# Altium PCB Dev_Board_Rev4.PcbDoc
Units mm, origin at the board's own origin, x right, y up, seen from the top; angles counter-clockwise.
Board outline 70 x 60 mm, 2 copper layers (Top Layer, Bottom Layer); 62 components, 49 nets, 269 pads, 20 vias.
Unrouted connection lines stored in the file: 1.
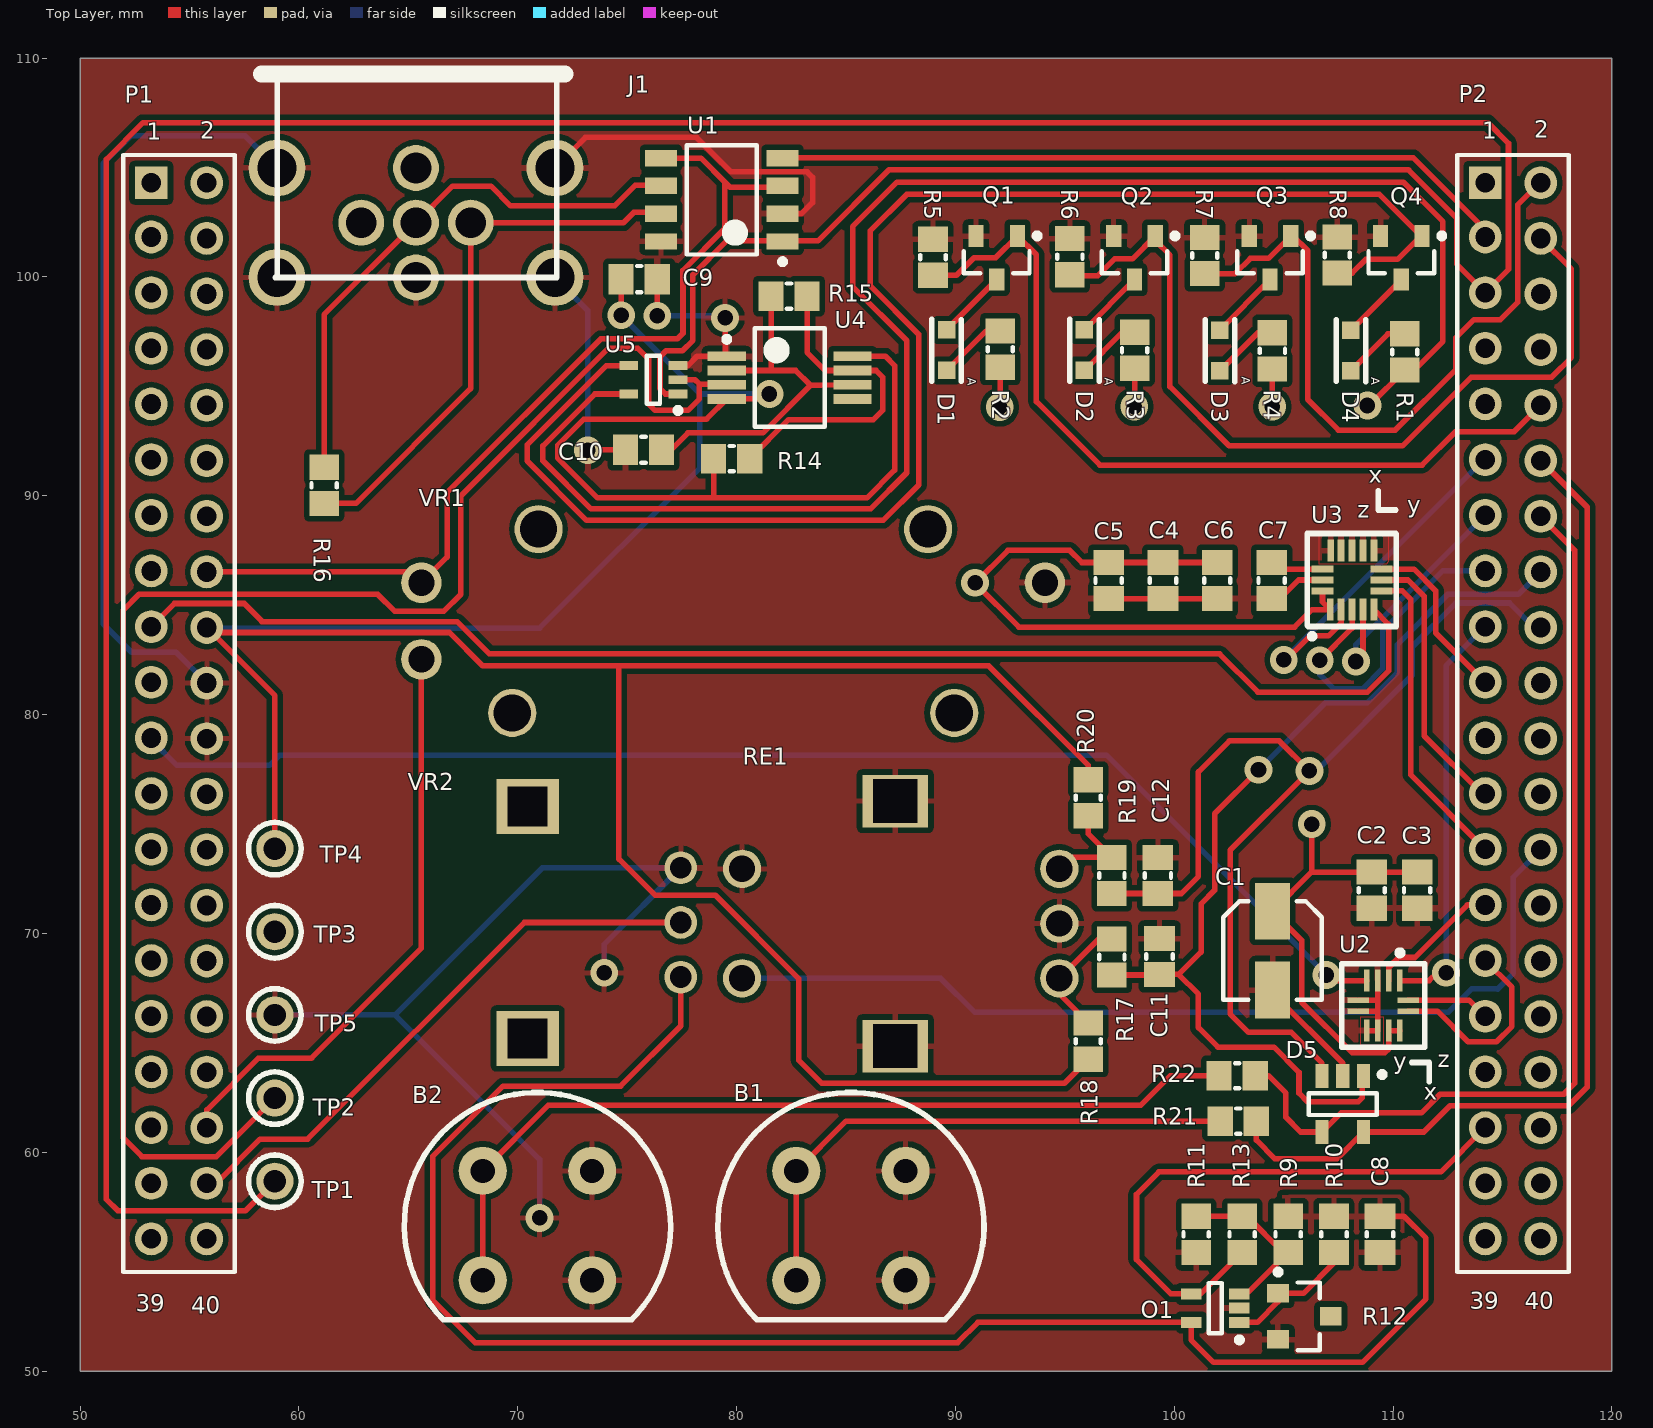
[diagram p0: Top Layer view]
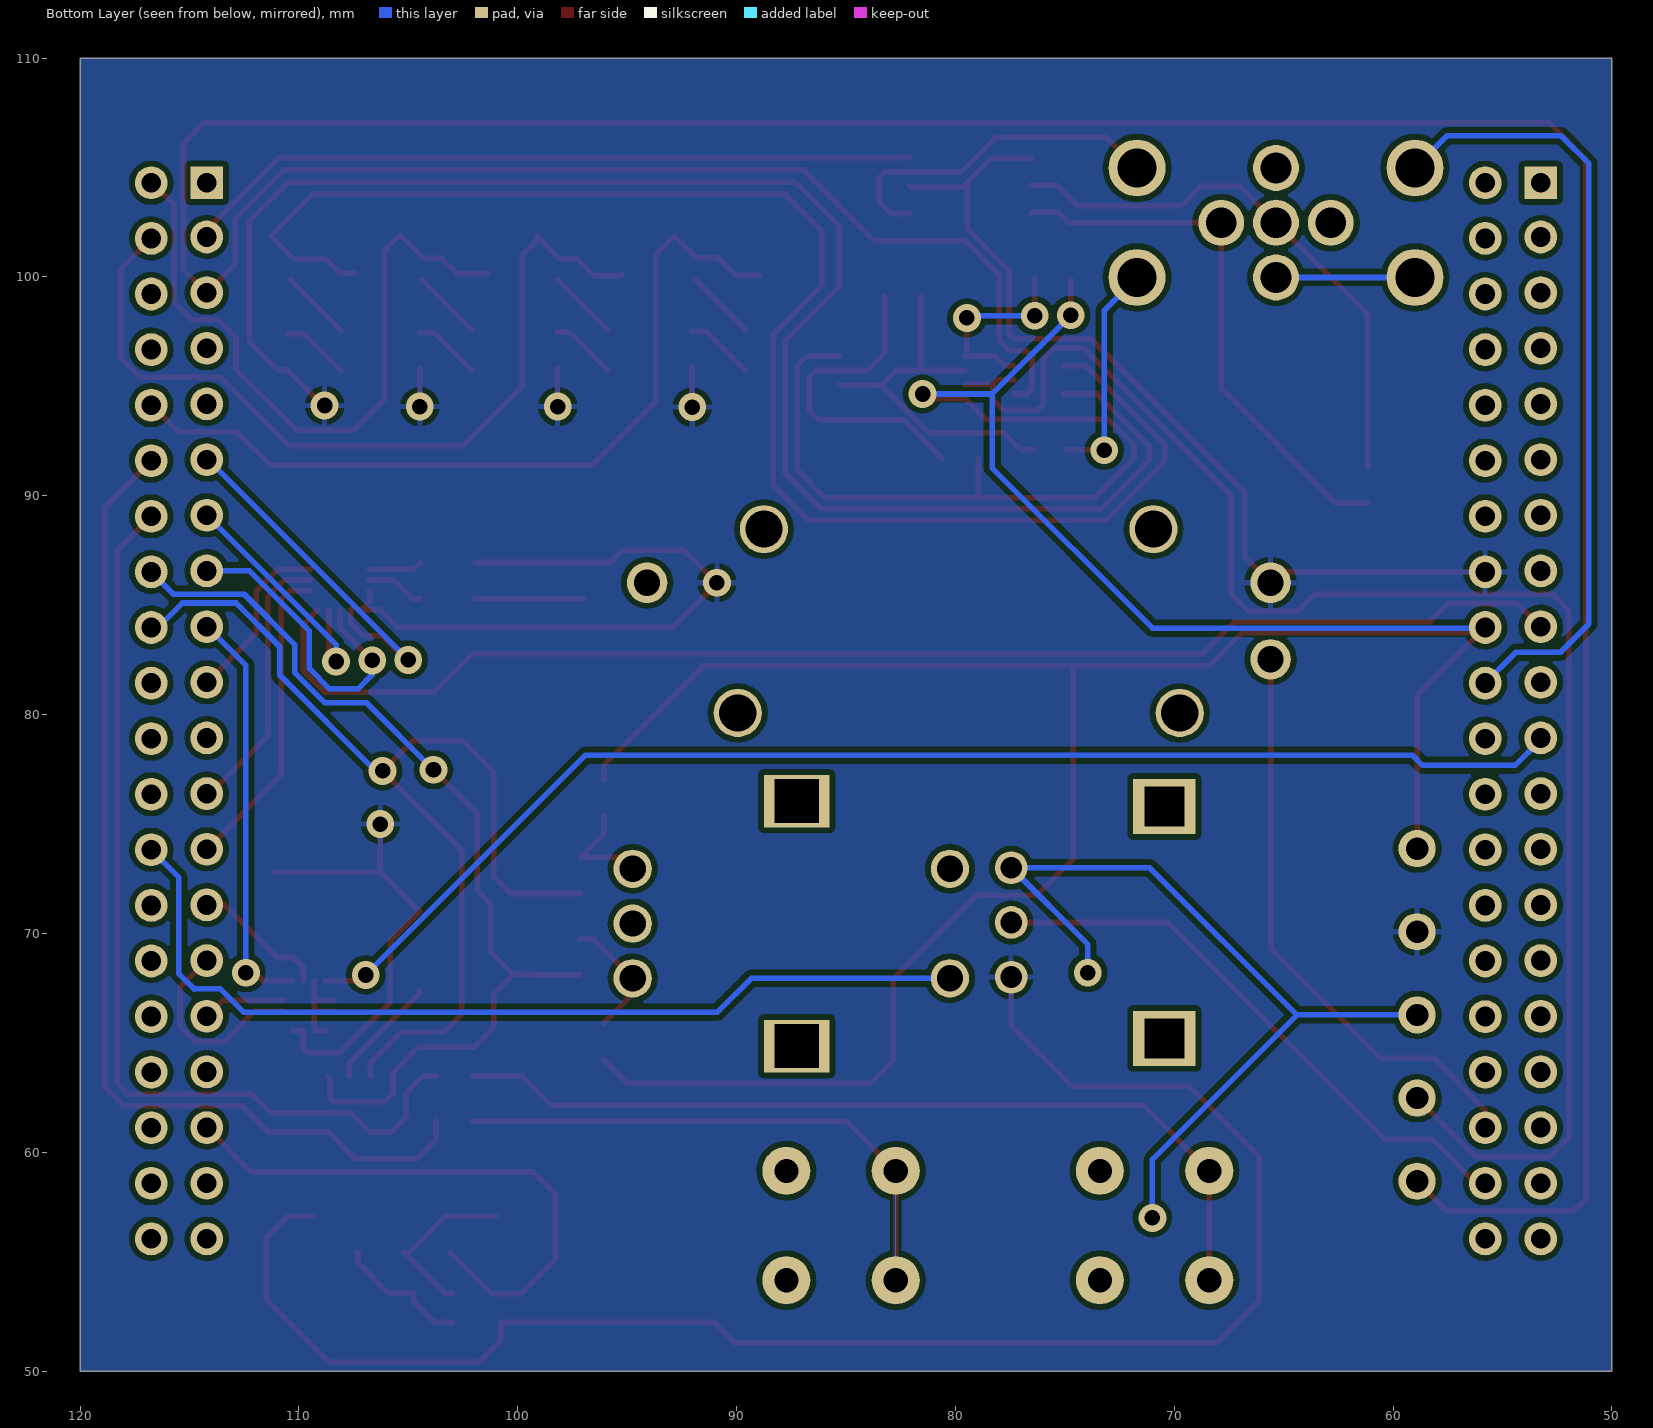
[diagram p1: Bottom Layer view, seen from below]
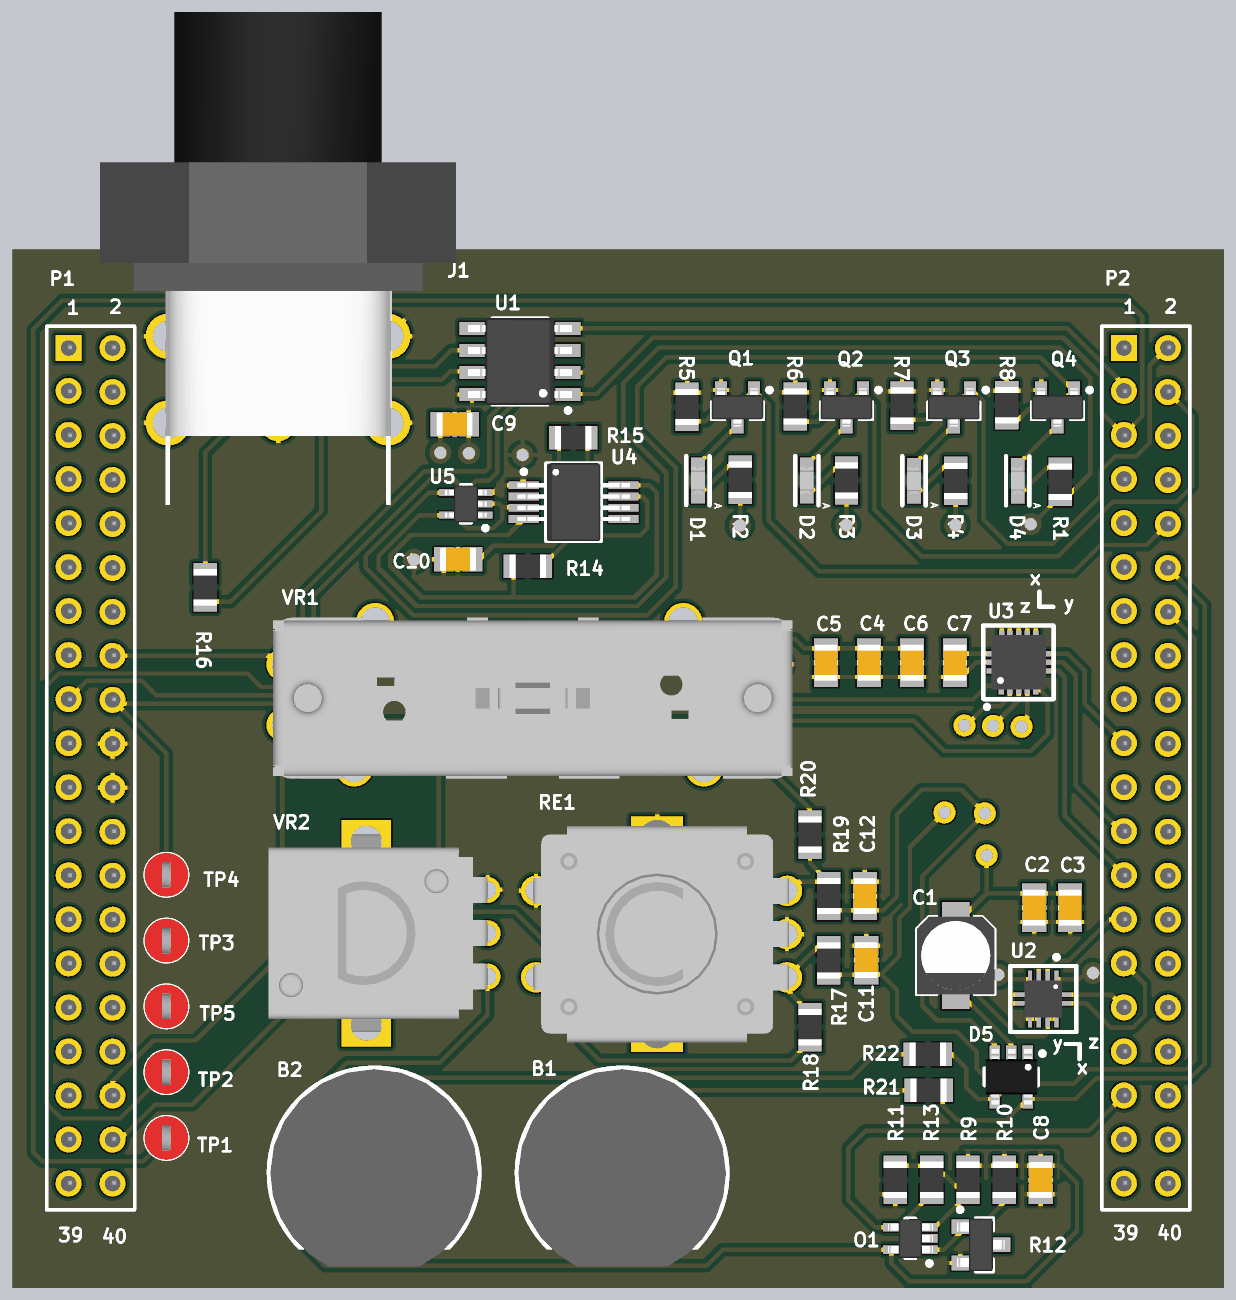
[diagram p2: 3D render of the assembled board from above, using the file's embedded part models]

## Layer stack, top to bottom
Top Solder: solder mask 0.0102, Solder Resist, Dk 3.5
Top Layer: signal copper 0.0356
Dielectric 1: dielectric 0.32, FR-4, Dk 4.8
Bottom Layer: signal copper 0.0356
Bottom Solder: solder mask 0.0102, Solder Resist, Dk 3.5

## Board outline
50,50 50,110 120,110 120,50

## Design rules (kind name [scope] priority, off if disabled: settings)
Clearance [All] p1: gap=0.254 ignorepadtopadclearanceinfootprint=TRUE except(0: Arc-Arc Arc-Track Arc-SMDPad Arc-THPad Arc-Via Arc-Text Arc-Hole Track-Track Track-SMDPad Track-THPad Track-Via Track-Text Track-Hole SMDPad-Hole THPad-Hole Via-Hole Fill-Hole Poly-Hole Region-Hole Text-Hole)
PolygonConnect [All] p1: connectstyle=Relief reliefconductorwidth=0.254 reliefentries=4 polygonreliefangle="90 Angle" airgapwidth=0.254
RoomDefinition U_ACCELEROMETER [InComponentClass('U_ACCELEROMETER')] p1: confinementstyle=ConfineIn formatcopy=TRUE lockcomponents=FALSE outline 100.964,64.983 100.964,73.441 108.022,73.441 108.022,73.9 112.264,73.9 112.264,64.576 107.057,64.576 107.057,64.983
RoomDefinition U_LEDS [InComponentClass('U_LEDS')] p2: confinementstyle=ConfineIn formatcopy=TRUE lockcomponents=FALSE outline 87.75,94.225 112.8,94.225 112.8,103.225 87.75,103.225
RoomDefinition U_GYRO [InComponentClass('U_GYRO')] p3: confinementstyle=ConfineIn formatcopy=TRUE lockcomponents=FALSE outline 95.8,88.675 110.325,88.675 110.325,83.325 95.8,83.325
RoomDefinition U_TEMP_SENSE [InComponentClass('U_TEMP_SENSE')] p4: confinementstyle=ConfineIn formatcopy=TRUE lockcomponents=FALSE outline 99.771,54.321 99.771,58.179 108.171,58.179 108.171,58.229 110.629,58.229 110.629,54.271 108.154,54.271 108.154,50.421 103.746,50.421 103.746,50.921 99.796,50.921 99.796,54.321
RoomDefinition U_INPUTS [InComponentClass('U_INPUTS')] p5: confinementstyle=ConfineIn formatcopy=TRUE lockcomponents=FALSE outline 64.319,78.619 64.319,89.931 95.371,89.931 95.371,78.129 97.304,78.129 97.304,74.629 100.479,74.629 100.479,70.929 100.554,70.929 100.554,64.729 104.804,64.729 104.804,64.554 110.004,64.554 110.004,59.846 91.689,59.846 91.689,50.996 64.436,50.996 64.436,78.619
RoomDefinition U_Connector [InComponentClass('U_Connector')] p6: confinementstyle=ConfineIn formatcopy=TRUE lockcomponents=FALSE outline 54.813,94.973 54.813,123.977 75.888,123.977 75.888,94.973 62.379,94.973 62.379,88.546 59.921,88.546 59.921,94.973
RoutingVias [All] p1: holewidth=0.711 width=1.27 viastyle="Through Hole" minholewidth=0.711 minwidth=1.27 maxholewidth=0.711 maxwidth=1.27
SolderMaskExpansion [All] p1: expansion=0.102
UnpouredPolygon [All] p1 off:
Width [All] p1: maxlimit=0.254 minlimit=0.254 preferedwidth=0.254
29 further rules are at their usual default settings.

## Classes and differential pairs
component class Main: P1 P2 TP1 TP2 TP3 TP4 TP5
component class U_555_OSC: C9 C10 R14 R15 U4
component class U_ACCELEROMETER: C1 C2 C3 U2
component class U_Connector: J1 R16
component class U_D-FLIP-FLOP: U5
component class U_INPUTS: B1 B2 C11 C12 D5 R17 R18 R19 R20 R21 R22 RE1 VR1 VR2
component class U_LEDS: D1 D2 D3 D4 Q1 Q2 Q3 Q4 R1 R2 R3 R4 R5 R6 R7 R8
component class U_TEMP_SENSE: C8 O1 R9 R10 R11 R12 R13
component class U_Transeiver: U1
component class U_GYRO: C4 C5 C6 C7 U3

## Components (designator, comment, footprint, x,y, rotation, side; value= is the part's Value field where it differs from the comment)
B1 "D6R90 F1 LFS" MomentaryButton 85.225,56.65 r0 top
B2 "D6R90 F1 LFS" MomentaryButton 70.9,56.65 r0 top
C1 "875105240001" "Aluminum Cap 875105240001" 104.493,69.212 r270 top
C2 "C0805C104K5RACTU" CAP0805 109.025,71.975 r90 top
C3 "C0805C104K5RACTU" CAP0805 111.1,71.975 r90 top
C4 "C0805C104K5RACTU" CAP0805 99.483,86.125 r90 top
C5 "C0805C104K5RACTU" CAP0805 97,86.125 r90 top
C6 "C2012JB1V106K125AC" CAP0805 101.967,86.125 r90 top
C7 "CGA4C2C0G1H103J060AA" CAP0805 104.45,86.125 r90 top
C8 "C0805C104K5RACTU" CAP0805 109.4,56.25 r90 top
C9 "CGA4C2C0G1H103J060AA" CAP0805 75.55,99.9 r180 top
C10 "C2012JB1V106K125AC" CAP0805 75.75,92.1 r0 top
C11 "CGA4C2C0G1H103J060AA" CAP0805 99.325,68.95 r90 top
C12 "CGA4C2C0G1H103J060AA" CAP0805 99.25,72.65 r270 top
D1 "SMLE12BC7TT86" SMLE12BC7TT86 89.6,97.575 r270 top
D2 "SML-D12U8WT86" SML-D12U8WT86 95.892,97.575 r270 top
D3 "SML-D12M8WT86" SML-D12M8WT86 102.083,97.561 r270 top
D4 "SML-511WWT86" SML-511WWT86 108.075,97.562 r270 top
D5 "RCLAMP3354S.TCT" SOT95P280X145-5N 107.7,62.2 r270 top
J1 "MOLEX 84864-9003" "MOLEX 84864-9003" 65.35,102.477 r0 top locked
O1 "MCP6241U" MCP6241U 101.875,52.875 r180 top
P1 "Female Header 20x2_BOTTOM" "FEMALE HDR2X20_BOTTOM" 53.25,104.3 r270 top locked
P2 "Female Header 20x2_BOTTOM" "FEMALE HDR2X20_BOTTOM" 114.21,104.3 r270 top locked
Q1 "2N7002P,215" 2N7002P,215 91.888,100.875 r270 top
Q2 "2N7002P,215" 2N7002P,215 98.183,100.875 r270 top
Q3 "2N7002P,215" 2N7002P,215 104.379,100.875 r270 top
Q4 "2N7002P,215" 2N7002P,215 110.375,100.875 r270 top
R1 "ERJ-6ENF64R9V" RES0805 110.538,96.575 r270 top
R2 "CRCW080588R7FKEA" RES0805 92.05,96.7 r270 top
R3 "RMCF0805JT56R0" RES0805 98.188,96.65 r270 top
R4 "RMCF0805JT56R0" RES0805 104.488,96.625 r270 top
R5 "RC0805FR-0710KL" RES0805 88.975,100.9 r270 top
R6 "RMCF0805FT10K0" RES0805 95.233,100.925 r270 top
R7 "RMCF0805FT10K0" RES0805 101.392,100.975 r270 top
R8 "RMCF0805FT10K0" RES0805 107.45,101 r270 top
R9 "RC0805FR-0756KL" RES0805 105.2,56.25 r90 top
R10 "RC0805FR-0756KL" RES0805 107.3,56.25 r90 top
R11 "ERJ-6ENF1131V" RES0805 101,56.25 r90 top
R12 "G-NICO-001" G-NICO-001 105.95,52.5 r0 top
R13 "RC0805FR-0739KL" RES0805 103.1,56.25 r270 top
R14 "ERJ-6ENF8871V" RES0805 79.775,91.7 r180 top
R15 "RC0805FR-0710KL" RES0805 82.4,99.125 r0 top
R16 "DNP" RES0805 61.15,90.475 r270 top
R17 "RC0805FR-0710KL" RES0805 97.15,68.925 r270 top
R18 "RC0805FR-0710KL" RES0805 96.075,65.075 r90 top
R19 "RC0805FR-0710KL" RES0805 97.15,72.65 r270 top
R20 "RC0805FR-0710KL" RES0805 96.075,76.2 r90 top
R21 "RC0805FR-07100RL" RES0805 102.925,61.425 r0 top
R22 "RC0805FR-07100RL" RES0805 102.875,63.5 r0 top
RE1 "PEC12R-4217F-S0024" "Bourns Inc. PEC12R-4217F-S0024" 94.75,67.95 r90 top
TP1 "Keystone Electronics 5000" "TEST POINT 5000K" 58.9,58.675 r270 top
TP2 "Keystone Electronics 5000" "TEST POINT 5000K" 58.9,62.475 r270 top
TP3 "Keystone Electronics 5000" "TEST POINT 5000K" 58.9,70.075 r270 top
TP4 "Keystone Electronics 5000" "TEST POINT 5000K" 58.9,73.875 r270 top
TP5 "Keystone Electronics 5000" "TEST POINT 5000K" 58.9,66.275 r270 top
U1 "SN65HVD234" SN65HVD234DR 79.325,103.525 r180 top
U2 "LIS2HH12TR" LIS2HH12TR 109.55,66.7 r270 top
U3 "L3GD20HTR" L3GD20HTR 108.125,86.15 r90 top
U4 "NE555PWR" TSOP65P650X120-8N 82.425,95.4 r0 top
U5 "SN74AUP1G79DCKR" SOT65P210X110-5N 76.2,95.3 r180 top
VR1 "PTA1543-2010CIB103" PTA1543-2010CIB103 79.85,84.275 r0 top
VR2 "PTV09A-4015F-B103" PTV09A-4015F-B103 77.45,70.5 r90 top

## Footprints (in the part's own frame and the unit in brackets; to place one, negate y for a bottom-side part, rotate by r counter-clockwise, add the part's x,y. Pads: shape width x height; smd on the part's side, far side on the other; paste and mask are expansions set on the pad)
2N7002P,215 [mm] "MOSFET N-CH 60V 0.36A SOT-23"
  rect 1x0.7 smd: D(1,0) G(-1,0.95) S(-1,-0.95)
  silkscreen extent -1.12,-1.5 0.7,1.98, body extent -1.1,-1.5 1.1,1.5, height 1.1
"Aluminum Cap 875105240001" [mm] "Aluminum Polymer Capacitor Radial, Can - SMD 45 mOhm 2000 Hrs @ 105°C"
  rect 2.6x1.6 smd: 1(-1.8,0) 2(1.8,0)
  silkscreen extent -2.25,-2.25 2.25,2.25, body extent -2.25,-2.25 2.25,2.25, height 6.3
"Bourns Inc. PEC12R-4217F-S0024" [mm] "ENCODER ROTARY"
  round 1.75 hole 1.2: 1(0,0) 2(2.5,0) 3(5,0) 4(0,14.5) 5(5,14.5)
  rect 2.4x3 hole 2 square unplated: 2(-3.1,7.5) 2(8.1,7.5)
  body extent -4.5,-0.1 9.5,14.65, height 17.5
CAP0805 [mm] "Capacitor with Footprint 0805"
  rect 1.15x1.4 smd: 1(-0.825,0) 2(0.825,0)
  silkscreen extent -0.1,-0.6 0.1,0.6, body extent -1.05,-0.67 1.05,0.68, height 1.55
"FEMALE HDR2X20_BOTTOM" [mm] "Connector; Header; 20x2 Position"
  rect 1.5x1.5 hole 0.9: 1(0,0)
  round 1.5 hole 0.9: 2(0,2.54) 3(2.475,0) 4(2.54,2.54) 5(5.019,0) 6(5.08,2.54) 7(7.562,0) 8(7.62,2.54) 9(10.106,0) 10(10.16,2.54) 11(12.649,0) 12(12.7,2.54) 13(15.193,0) 14(15.24,2.54) 15(17.737,0) 16(17.78,2.54) 17(20.28,0) 18(20.32,2.54) 19(22.824,0) 20(22.86,2.54) 21(25.367,0) 22(25.4,2.54) 23(27.911,0) 24(27.94,2.54) 25(30.455,0) 26(30.48,2.54) 27(32.998,0) 28(33.02,2.54) 29(35.542,0) 30(35.56,2.54) 31(38.086,0) 32(38.1,2.54) 33(40.629,0) 34(40.64,2.54) 35(43.173,0) 36(43.18,2.54) 37(45.716,0) 38(45.72,2.54) 39(48.26,0) 40(48.26,2.54)
  silkscreen extent -1.27,-1.27 49.78,3.81, body extent -1.31,-1.18 49.49,3.9, height 2.7
G-NICO-001 [mm] "RTD -55°C ~ 150°C TO-236-3, SC-59, SOT-23-3"
  rect 1x0.85 smd: 1(-1.2,1.05) 2(-1.2,-1.05) 3(1.2,0)
  silkscreen extent -1.32,-1.55 0.7,2.15, body extent -1.37,-1.53 1.37,1.53, height 1.12
L3GD20HTR [mm] "IC MEMS MOTION SENSOR 16LLGA"
  rect 1x0.31 smd: 1(-1.35,1) 2(-1.35,0.5) 3(-1.35,0) 4(-1.35,-0.5) 5(-1.35,-1) 9(1.35,-1) 10(1.35,-0.5) 11(1.35,0) 12(1.35,0.5) 13(1.35,0.975)
  rect 0.31x1 smd: 6(-0.5,-1.35) 7(0,-1.35) 8(0.5,-1.35) 14(0.5,1.35) 15(0,1.35) 16(-0.5,1.35)
  silkscreen extent -2.69,-2.02 2.12,2.05, body extent -1.58,-1.58 1.58,1.58, height 1
LIS2HH12TR [mm] "ACCELEROMETER 2-8G I2C/SPI 12LGA"
  rect 1x0.25 smd: 1(-1.143,0.762) 2(-1.143,0.254) 3(-1.143,-0.254) 4(-1.143,-0.762) 7(1.143,-0.762) 8(1.143,-0.254) 9(1.143,0.254) 10(1.143,0.762)
  rect 0.25x1 smd: 5(-0.254,-1.143) 6(0.254,-1.143) 11(0.254,1.143) 12(-0.254,1.143)
  silkscreen extent -2.54,-1.91 1.91,1.91, body extent -1.07,-1.07 1.08,1.08, height 1
MCP6241U [mm] "General Purpose Amplifier Circuit Rail-to-Rail SC-70-5"
  rect 0.95x0.5 smd: 1(-1.1,0.65) 2(-1.1,0) 3(-1.1,-0.65) 4(1.1,-0.65) 5(1.1,0.65)
  silkscreen extent -1.23,-1.15 0.3,1.57, body extent -1.3,-1.12 1.3,1.12, height 1.1
"MOLEX 84864-9003" [mm] "CONN RCPT MALE M12 5POS SLDR"
  round 2.1 hole 1.397: 1(0,2.502) 2(-2.502,0) 3(0,-2.502) 4(2.502,0) 5(0,0)
  round 2.6 hole 1.778: 6(6.35,2.502) 7(6.35,-2.502) 8(-6.35,2.502) 9(-6.35,-2.502)
  silkscreen extent -7.07,-2.5 6.82,6.8, body extent -10.28,-7.25 10.28,21.25, height 20.54
MomentaryButton [mm]
  round 2.2 hole 1.1: 1(2.5,2.5) 2(2.5,-2.5) 3(-2.5,-2.5) 4(-2.5,2.5)
  silkscreen extent -6.08,-4.3 6.08,6.08, body extent -6,-5.4 6,6, height 14.3
PTA1543-2010CIB103 [mm] "POT SLIDE 10K OHM .05W 15MM"
  round 1.85 hole 1.2: 1(-14.25,1.75) 2(-14.25,-1.75) 3(14.24,1.75)
  round 2.2 hole 1.7: 4(-8.9,4.2) 5(-10.1,-4.2) 6(8.9,4.2) 7(10.1,-4.2)
  body extent -14.79,-4.85 15.21,4.45, height 16.5
PTV09A-4015F-B103 [mm] "POT 10K OHM 1/20W CARBON LINEAR"
  round 1.5 hole 1: 1(-2.5,0) 2(0,0) 3(2.5,0)
  rect 2.5x2.85 hole 1.8 square: 4(-5.3,7) 5(5.3,7)
  body extent -5.7,0 5.7,12.65, height 15
RES0805 [mm] "Resistor with 0805 Footprint"
  rect 1.15x1.35 smd: 1(-0.825,0) 2(0.825,0)
  silkscreen extent -0.1,-0.58 0.1,0.58, body extent -1.05,-0.67 1.05,0.67, height 0.6
SML-511WWT86 [mm] "LED YELLOW DIFFUSED 0603 SMD"
  rect 0.8x0.8 smd: 1(0,0) 2(1.85,0)
  silkscreen extent -0.49,-0.67 2.35,0.67, body extent 0.13,-0.4 1.73,0.4, height 0.39
SML-D12M8WT86 [mm] "LED GREEN DIFFUSED 0603 SMD"
  rect 0.8x0.8 smd: 1(0,0) 2(1.85,0)
  silkscreen extent -0.49,-0.67 2.35,0.67, body extent 0.13,-0.4 1.73,0.4, height 0.39
SML-D12U8WT86 [mm] "LED RED DIFFUSED 0603 SMD"
  rect 0.8x0.8 smd: 1(0,0) 2(1.85,0)
  silkscreen extent -0.49,-0.67 2.35,0.67, body extent 0.13,-0.4 1.73,0.4, height 0.39
SMLE12BC7TT86 [mm] "LED BLUE CLEAR 0603 SMD"
  rect 0.8x0.8 smd: 1(0,0) 2(1.85,0)
  silkscreen extent -0.49,-0.67 2.35,0.67, body extent 0.13,-0.4 1.73,0.4, height 0.39
SN65HVD234DR [mm] "IC CAN TRANSCEIVER 3.3V 8-SOIC"
  rect 1.45x0.75 smd: 1(-2.775,1.905) 2(-2.775,0.635) 3(-2.775,-0.635) 4(-2.775,-1.905) 5(2.775,-1.905) 6(2.775,-0.635) 7(2.775,0.635) 8(2.775,1.905)
  silkscreen extent -2.9,-2.5 1.6,2.95, body extent -3,-2.5 3,2.5, height 1.75
SOT65P210X110-5N [mm] "SOT23, 5-Leads, Body 2.00x2.10mm, Pitch 0.65mm, IPC Medium Density"
  rect 0.85x0.4 smd: 1(-1.125,0.65) 2(-1.125,0) 3(-1.125,-0.65) 4(1.125,-0.65) 5(1.125,0.65)
  silkscreen extent -1.25,-1.1 0.3,1.52, body extent -1.2,-1.07 1.2,1.07, height 1.1
SOT95P280X145-5N [mm] "SOT23, 5-Leads, Body 2.95x2.80mm, Pitch 0.95mm, IPC Medium Density"
  rect 1.1x0.6 smd: 1(-1.275,0.95) 2(-1.275,0) 3(-1.275,-0.95) 4(1.275,-0.95) 5(1.275,0.95)
  silkscreen extent -1.47,-1.55 0.5,1.93, body extent -1.6,-1.48 1.6,1.52, height 0.91
"TEST POINT 5000K" [mm] "Test Point, 5000 Keystone Series, 0.040\" Hole"
  round 1.7 hole 1.02 mask+0.1: 1(0,0)
  silkscreen extent -1.2,-1.2 1.2,1.2, body extent -1.27,-1.27 1.27,1.27, height 4.42
TSOP65P650X120-8N [mm] "TSOP, 8-Leads, Body 4.40x3.00mm, Pitch 0.65mm, IPC Medium Density"
  rect 1.75x0.45 smd: 1(-2.875,0.975) 2(-2.875,0.325) 3(-2.875,-0.325) 4(-2.875,-0.975) 5(2.875,-0.975) 6(2.875,-0.325) 7(2.875,0.325) 8(2.875,0.975)
  silkscreen extent -3,-2.25 1.6,2.25, body extent -3.25,-2.25 3.25,2.25, height 1.2

## Part data
B1 B2: "SWITCH PUSH SPST-NO 0.1A 32V", Current Rating="100ma (DC)", Supplier Part Number 1=401-1978-ND, Voltage Rating - DC=32V, Detailed Description="Pushbutton Switch SPST-NO Keyswitch Through Hole", Electrical Life="250,000 Cycles", Mounting Type="Through Hole", Supplier 1=Digi-Key, Switch Function=Off-Mom
C1: "CAP ALUM POLY 10UF 20% 10V SMD", Capacitance=10µF, ESR (Equivalent Series Resistance)="45 mOhm", Lifetime @ Temp.="2000 Hrs @ 105°C", Operating Temperature="-55°C ~ 105°C", Package / Case="Radial, Can - SMD", Ripple Current - High Frequency="1.2A @ 100kHz", Ripple Current - Low Frequency="60mA @ 120Hz", Supplier Part Number 1=732-6401-1-ND, Tolerance=±20%, Voltage - Rated=10V, Applications="General Purpose", Height - Seated (Max)="0.217\" (5.50mm)", Size / Dimension="0.157\" Dia (4.00mm)", Supplier 1=Digi-Key, Surface Mount Land Size="0.169\" L x 0.169\" W (4.30mm x 4.30mm)", Type=Polymer
C2 C3 C4 C5 C8: "CAP CER 0.1UF 50V X7R 0805", Capacitance=0.1µF, Package / Case=0805, Supplier Part Number 1=399-1170-1-ND, Temperature Coefficient=X7R, Tolerance=±10%, Voltage - Rated=50V, Supplier 1=Digi-Key
C6 C10: "CAP CER 10UF 35V JB 0805", Capacitance=10uF, Package / Case=0805, Supplier Part Number 1=445-11517-1-ND, Tolerance=±20%, Voltage - Rated=35V, Supplier 1=Digi-Key
C7 C11 C12: "CAP CER 10000PF 50V C0G 0805", Capacitance=10nF, Operating Temperature="-55°C ~ 125°C", Package / Case=0805, Supplier Part Number 1=445-6947-1-ND, Tolerance=±5%, Voltage - Rated=50V, Supplier 1=Digi-Key, Thickness=0.7mm
C9: "CAP CER 10000PF 50V C0G 0805", Capacitance=10nf, Operating Temperature="-55°C ~ 125°C", Package / Case=0805, Supplier Part Number 1=445-6947-1-ND, Tolerance=±5%, Voltage - Rated=50V, Supplier 1=Digi-Key, Thickness=0.7mm
D1: "LED BLUE CLEAR 0603 SMD", Color=Blue, Current - Test=5mA, Lens Color=Colorless, Millicandela Rating=22mcd, Package / Case=0603, Supplier Part Number 1=511-1589-1-ND, Voltage - Forward (Vf) (Typ)=2.9V, Lens Style/Size="Rectangle with Flat Top, 1.20mm x 0.80mm", Lens Transparency=Clear, Supplier 1=Digi-Key, Wavelength - Dominant=470nm
D2: "LED RED DIFFUSED 0603 SMD", Color=Red, Current - Test=20mA, Lens Color=White, Millicandela Rating=63mcd, Package / Case=0603, Supplier Part Number 1=511-1580-1-ND, Voltage - Forward (Vf) (Typ)=2.2V, Lens Transparency=Diffused, Supplier 1=Digi-Key, Wavelength - Dominant=620nm
D3: "LED GREEN DIFFUSED 0603 SMD", Color=Green, Current - Test=20mA, Lens Color=White, Millicandela Rating=25mcd, Package / Case=0603, Supplier Part Number 1=511-1578-1-ND, Voltage - Forward (Vf) (Typ)=2.2V, Lens Style/Size="Rectangle with Flat Top, 1.20mm x 0.80mm", Lens Transparency=Diffused, Supplier 1=Digi-Key, Wavelength - Dominant=572nm
D4: "LED YELLOW DIFFUSED 0603 SMD", Colour=Yellow, Current - Test=20mA, Lens Colour=White, Millicandela Rating=40mcd, Package / Case=0603, Voltage - Forward (Vf) (Type)=2V, Detailed Description="Yellow 590nm LED Indication - Discrete 2V 0603 (1608 Metric)", Height - Max=0.65mm, Lens Style/Size="Rectangle with Flat Top, 1.20mm x 0.80mm", Lens Transparancy=Diffused, Mounting Type="Surface Mount", Supplier 1=Digi-Key, Wavelength - Dominant=590nm
D5: "TVS DIODE 3.3VWM 16VC", Supplier Part Number 1=RCLAMP3354STCTCT-ND, Supplier 1=Digi-Key
J1: "CAN Micro-Change M12, Right Angle, Male", Current Rating=4A, Operating Temperature="-20°C ~ 80°C", Supplier Part Number 1=0848649003-ND, Voltage - Rated="250VAC, 250VDC", Contact Finish=Gold, Detailed Description="5 Position Circular Connector Receptacle, Male Pins Solder Gold", Fastening Type=Threaded, Ingress Protection="IP67 - Dust Tight, Waterproof", Orientation=Keyed, Shell Material, Finish="Brass, Nickel Plated", Supplier 1=Digi-Key
O1: "IC OPAMP GP 550KHZ RRO SC70-5", Current - Input Bias=1pA, Current - Output / Channel=23mA, Current - Supply=50µA, Operating Temperature="-40°C ~ 125°C", Package / Case="5-TSSOP, SC-70-5, SOT-353", Supplier Part Number 1=MCP6241UT-E/LTCT-ND, Voltage - Input Offset=5mV, Voltage - Supply, Single/Dual (±)="1.8 V ~ 5.5 V", -3db Bandwidth=-, Amplifier Type="General Purpose", Gain Bandwidth Product=550kHz, Number of Circuits=1, Output Type=Rail-to-Rail, Slew Rate="0.3 V/µs", Supplier 1=Digi-Key
P1 P2: "CONN HEADR FMALE 20POS .1\" DL AU", Supplier Part Number 1=S9197-ND, Supplier 1=Digi-Key
Q1 Q2 Q3 Q4: "MOSFET N-CH 60V 0.36A SOT-23", Current - Continuous Drain (Id) @ 25°C="360mA (Ta)", Drain to Source Voltage (Vdss)=60V, Drive Voltage (Max Rds On, Min Rds On)=10V, Input Capacitance (Ciss) (Max) @ Vds="50pF @ 10V", Package / Case="TO-236-3, SC-59, SOT-23-3", Power Dissipation (Max)="350mW (Ta)", Supplier Part Number 1=1727-4692-1-ND, FET Type=N-Channel, Gate Charge (Qg) (Max) @ Vgs="0.8nC @ 4.5V", Rds On (Max) @ Id, Vgs="1.6 Ohm @ 500mA, 10V", Supplier 1=Digi-Key, Technology="MOSFET (Metal Oxide)", Vgs (Max)=±20V, Vgs(th) (Max) @ Id  2.4V @=250µA
R1: "RES SMD 64.9 OHM 1% 1/8W 0805", Operating Temperature="-55°C ~ 155°C", Package / Case=0805, Power (Watts)="0.125W, 1/8W", Resistance="64.9 Ohms", Supplier Part Number 1=P64.9CCT-ND, Tolerance=±1%, Detailed Description="±1% 0.125W, 1/8W Chip Resistor 0805 (2012 Metric) Automotive AEC-Q200 Thick Film", Features="Automotive AEC-Q200", Height - Seated (Max)="0.028\" (0.70mm)", Supplier 1=Digi-Key
R2: "RES SMD 88.7 OHM 1% 1/8W 0805", Operating Temperature="-55°C ~ 155°C", Package / Case=0805, Power (Watts)="0.125W, 1/8W", Resistance=88.7, Supplier Part Number 1=541-88.7CCT-ND, Tolerance=±1%, Supplier 1=Digi-Key
R3 R4: "RES SMD 56 OHM 5% 1/8W 0805", Package / Case=0805, Power (Watts)="0.125W, 1/8W", Resistance (Ohms)=56, Supplier Part Number 1=RMCF0805JT56R0CT-ND, Composition="Thick Film", Supplier 1=Digi-Key
R5 R15 R17 R18 R19 R20: "RES SMD 10K OHM 1% 1/8W 0805", Manufacturer=Yageo, Operating Temperature="-55°C ~ 155°C", Package / Case=0805, Power (Watts)="0.125W, 1/8W", Resistance="10 kOhms", Supplier Part Number 1=311-10.0KCRCT-ND, Temperature Coefficient=±100ppm/°C, Tolerance=±1%, Composition="Thick Film", Features="Moisture Resistant", Supplier 1=Digi-Key
R6 R7 R8: "RES SMD 10K OHM 1% 1/8W 0805", Package / Case=0805, Power (Watts)="0.125W, 1/8W", Resistance="10 kOhms", Supplier Part Number 1=RMCF0805FT10K0CT-ND, Tolerance=±1%, Features="Automotive AEC-Q200", Height - Seated (Max)="0.026\" (0.65mm)", Supplier 1=Digi-Key
R9 R10: "RES SMD 56K OHM 1% 1/8W 0805", Operating Temperature="-55°C ~ 155°C", Package / Case=0805, Power (Watts)="0.125W, 1/8W", Resistance=56k, Supplier Part Number 1=311-56.0KCRCT-ND, Temperature Coefficient=±100ppm/°C, Tolerance=±1%, Composition="Thick Film", Features="Moisture Resistant", Supplier 1=Digi-Key
R11: "RES SMD 1.13K OHM 1% 1/8W 0805", Operating Temperature="-55°C ~ 155°C", Power (Watts)="0.125W, 1/8W", Resistance="1.13 kOhms", Supplier Device Package=0805, Supplier Part Number 1=P1.13KCCT-ND, Tolerance=±1%, Detailed Description="±1% 0.125W, 1/8W Chip Resistor 0805 (2012 Metric) Automotive AEC-Q200 Thick Film", Features="Automotive AEC-Q200", Height - Seated (Max)="0.028\" (0.70mm)", Supplier 1=Digi-Key
R12: "SENSOR TEMP RTD 1.0K OHM SOT23", Current=5mA, Manufacturer="TE Connectivity Measurement Specialties", Package / Case="TO-236-3, SC-59, SOT-23-3", Resistance="1 kOhms", Supplier Part Number 1=223-1563-1-ND, Temperature="-55°C ~ 150°C", Supplier 1=Digi-Key, Thermistor Type=RTD
R13: "RES SMD 39K OHM 1% 1/8W 0805", Operating Temperature="-55°C ~ 155°C", Package / Case=0805, Power (Watts)="0.125W, 1/8W", Resistance=39k, Supplier Part Number 1=311-39.0KCRCT-ND, Temperature Coefficient=±100ppm/°C, Tolerance=±1%, Composition="Thick Film", Features="Moisture Resistant", Supplier 1=Digi-Key
R14: "RES SMD 8.87K OHM 1% 1/8W 0805", Operating Temperature="-55°C ~ 155°C", Package / Case=0805, Power (Watts)="0.125W, 1/8W", Resistance="8.87 kOhms", Tolerance=±1%, Features="Automotive AEC-Q200", Height - Seated (Max)="0.028\" (0.70mm)", Supplier 1=Digi-Key
R16: "RES SMD 0.0 OHM JUMPER 1/8W 0805", Package / Case=0805, Power (Watts)="0.125W, 1/8W", Resistance="0 Ohms", Tolerance=Jumper, Supplier 1=Digi-Key, Supplier Part Number 2=311-0.0ARCT-ND
R21 R22: "RES SMD 100 OHM 1% 1/8W 0805", Package / Case=0805, Power (Watts)="0.125W, 1/8W", Resistance (Ohms)=100, Supplier Part Number 1=311-100CRCT-ND, Tolerance=±1%, Composition="Thick Film", Supplier 1=Digi-Key
RE1: "ENCODER ROTARY", Supplier Part Number 1=PEC12R-4217F-S0024-ND, Voltage - Supply=-, Actuator Type="6mm Dia Flatted End", Built in Switch=Yes, Detent=Yes, Encoder Type=Mechanical, Mounting Type="PCB, Through Hole", Orientation=Vertical, Output Type="Quadrature (Incremental)", Pulses per Revolution=24, Rotational Life (Cycles Min)=30K, Supplier 1=Digi-Key
TP1 TP2 TP3 TP4 TP5: "TEST POINT PC MINI .040\"D RED", Supplier Part Number 1=36-5000-ND, Mounting Type="0.040\" (1.02mm) Hole Diameter", Supplier 1=Digi-Key, Type="PC Test Point, Miniature"
U1: "IC CAN TRANSCEIVER 3.3V 8-SOIC", Manufacturer Part Number=SN65HVD234DR, Operating Temperature="-40°C ~ 125°C", Package / Case=8-SOIC, Supplier Part Number 1=296-27991-1-ND, Voltage - Supply="3 V ~ 3.6 V", Data Rate=1Mbps, Duplex=Half, Number of Drivers/Receivers=1/1, Protocol=CAN, Receiver Hysteresis=100mV, Supplier 1=Digi-Key, Type=Transceiver
U2: "ACCELEROMETER 2-8G I2C/SPI 12LGA", Operating Temperature="-40°C ~ 85°C (TA)", Package / Case=12-VFLGA, Supplier Part Number 1=497-15069-1-ND, 1.71 V ~ 3.6 V="Voltage - Supply", Acceleration Range="±2g, 4g, 8g", Axis="X, Y, Z", Bandwidth="5Hz ~ 400Hz", Features="Adjustable Bandwidth, Selectable Scale, Temperature Sensor", Output Type="I²C, SPI", Sensitivity (LSB/g)="16393 (±2g) ~ 4098 (±8g)", Supplier 1=Digi-Key, Type=Digital
U3: "IC MEMS MOTION SENSOR 16LLGA", Current - Supply=5mA, Manufacturer=STMicroelectronics, Operating Temperature="-40°C ~ 85°C (TA)", Package / Case=16-LGA, Supplier Part Number 1=497-13931-1-ND, Voltage - Supply="2.2 V ~ 3.6 V", Axis="X (Pitch), Y (Roll), Z (Yaw)", Bandwidth="6.25Hz ~ 400Hz", Output Type="I²C, SPI", Range °/s="±245, 500, 2000", Sensitivity (LSB/(°/s))="8.75 ~ 70", Supplier 1=Digi-Key, Type=Digital
U4: "IC OSC SGL TIMER 100KHZ 8TSSOP", Current - Supply=10mA, Frequency=100kHz, Operating Temperature="0°C ~ 70°C", Package / Case="8-TSSOP (0.173\", 4.40mm Width)", Supplier Part Number 1=296-29904-1-ND, Voltage - Supply="4.5 V ~ 16 V", Detailed Description="555 Type, Timer/Oscillator (Single) IC 100kHz 8-TSSOP", Mounting Type="Surface Mount", Supplier 1=Digi-Key, Type="555 Type, Timer/Oscillator (Single)"
U5: "IC D-TYPE POS TRG SNGL SC70-5", Clock Frequency=266MHz, Current - Quiescent (Iq)=500nA, Input Capacitance=1.5pF, Operating Temperature="-40°C ~ 85°C (TA)", Package / Case="5-TSSOP, SC-70-5, SOT-353", Supplier Part Number 1=296-17660-1-ND, Voltage - Supply="0.8 V ~ 3.6 V", Max Propagation Delay @ V, Max CL="5.8ns @ 3.3V, 30pF", Number of Bits per Element=1, Number of Elements=1, Output Type=Non-Inverted, Supplier 1=Digi-Key, Trigger Type="Positive Edge", Type=D-Type
VR1: "POT SLIDE 10K OHM .05W 15MM", Power (Watts)="0.05W, 1/20W", Resistance="10 kOhms", Supplier Part Number 1=PTA1543-2010CIB103-ND, Tolerance=±20%, Detailed Description="0.05W, 1/20W Through Hole Slide Potentiometer Top Adjustment Type", Fader Type=Standard, Mounting Type="Through Hole", Supplier 1=Digi-Key, Travel Range=15mm
VR2: "POT 10K OHM 1/20W CARBON LINEAR", Power (Watts)="0.05W, 1/20W", Resistance (Ohms)=10k, Supplier Part Number 1=PTV09A-4015F-B103-ND, Tolerance=±20%, Built in Switch=None, Detailed Description="10k Ohm Gang Linear Through Hole, Snap In Potentiometer None 1 Turn Carbon 0.05W, 1/20W PC Pins, Board Locks", Mounting Type="Through Hole, Snap In", Rotation=280°, Supplier 1=Digi-Key, Termination Style="PC Pins, Board locks"

## Via types
v1: diameter 1.27, hole 0.711, Top Layer to Bottom Layer, tented top, 12 vias
v2: diameter 1.27, hole 0.711, Top Layer to Bottom Layer, 8 vias

## Nets (pads, with @x,y where several pads share a name; then routed paths per layer and width w, separated by ;. In a path a pad name is that pad's centre, name@x,y a point inside that pad or via, vN(x,y) a via of type N, cw(c..) or ccw(c..) an arc to the next point about the centre after c; other vN are vias at no path point)
3V3: C1.1 C2.2 C3.2 C4.2 C5.2 C6.2 C8.2 O1.5 P1.16 R1.2 R2.2 R3.2 R4.2 R9.2 R10.2 TP3.1 U1.3 U1.5 U2.9 U2.10 U3.1 U3.16 U5.5 VR1.1 VR2.1 | length 250.2
  Top Layer w0.254: P1.16 65.105,86.52 VR1.1 66.775,87.2 66.775,90.15 73.8,97.175 77.3,97.175 77.55,97.425 77.55,100.3 79.45,102.2 79.45,104.35 ; U5.5 73.525,94.65 71.15,92.275 71.15,91.6 73.35,89.4 86.125,89.4 87.775,91.05 87.775,97.092 85.3,99.567 85.3,102.3 87.335,104.335 110.465,104.335 112.275,102.525 112.275,97.05 110.975,95.75 R1.2 108.913,94.125 v1(108.825,94.125) ; U1.5 78.37,105.43 79.45,104.35 ; VR2.1 77.45,65.775 74.7,63.025 69.325,63.025 66.125,59.825 66.125,53.225 68.05,51.3 90.1,51.3 91.025,52.225 O1.5 100.775,51.425 101.8,50.4 108.6,50.4 111.5,53.3 111.5,56.075 110.5,57.075 C8.2 ; U1.3 82.04,104.1 79.7,104.1 79.45,104.35 ; R2.2 92.05,94.075 v1(92.025,94.05) v1@92.1,93.975 ; v1(98.175,94.075) 98.188,94.088 R3.2 ; C6.2 C4.2 C5.2 95.775,86.95 95.225,87.5 92.4,87.5 90.9,86 92.9,84 105.5,84 106.3,84.8 U3.1 106.775,85.15 U3.16 ; v1(104.475,94.075) 104.488,94.088 R4.2 ; v2(106.281,74.994) 106.281,72.8 ; U2.10 U2.9 109.804,64.729 109.625,64.55 108.125,64.55 105.825,66.85 105.825,69.68 C1.1 106.281,72.8 ; C3.2 C2.2 106.281,72.8
  other v1: 90.9,86.025
5V: C9.2 P1.18 R14.2 R18.1 R20.2 TP4.1 U4.4 U4.8 | length 167.2
  Top Layer w0.254: P1.18 P1.18@56.02,83.75 ; TP4.1 58.9,80.87 P1.18@56.02,83.75 ; v1(74.725,98.25) C9.2 ; R14.2 78.95,89.9 ; v1(81.5,94.65) 81.275,94.425 U4.4 78.625,93.5 73.025,93.5 71.825,92.3 71.825,91.725 73.65,89.9 78.95,89.9 ; U4.8 86.8,96.375 87.225,95.95 87.225,91.175 85.95,89.9 78.95,89.9 ; R18.1 94.975,63.15 83.9,63.15 82.85,64.2 82.85,67.925 79.025,71.75 76.275,71.75 74.625,73.4 74.625,82.225 ; R20.2 96.075,77.675 91.525,82.225 74.625,82.225 ; P1.18@56.02,83.75 66.875,83.75 68.4,82.225 74.625,82.225
  Bottom Layer w0.254: P1.18 55.82,83.95 71,83.95 78.325,91.275 78.325,94.65 ; v1(74.725,98.25) 78.325,94.65 ; v1(81.5,94.65) 78.325,94.65
BUTTON_1: D5.5 P2.12 R21.2 | length 52.2
  Top Layer w0.254: R21.2 103.75,60.55 104.6,59.7 107.425,59.7 D5.5 111.4,60.925 112.6,62.125 118.025,62.125 118.875,62.975 118.875,89.475 P2.12
  Bottom Layer w0: 82.725,54.15 82.725,59.15
BUTTON_2: D5.4 P2.14 R22.2 | length 43.8
  Top Layer w0.254: R22.2 104.3,63.5 105.1,62.7 105.1,61.6 105.775,60.925 D5.4 107.625,61.8 111.3,61.8 112.15,62.65 117.8,62.65 118.3,63.15 118.3,87.51 P2.14
CAN_RX: P2.3 U1.4 | length 33.8
  Top Layer w0.254: U1.4@82.1,105.455 110.92,105.455 114.21,102.165 P2.3
CAN_TX: P2.5 TP1.1 U1.1 U5.1 | length 177.4
  Top Layer w0.254: TP1.1 57.55,57.325 51.725,57.325 51.2,57.85 51.2,105.375 52.875,107.05 114.325,107.05 115.275,106.1 115.275,100.346 P2.5 112.9,100.591 112.9,102.7 110.705,104.895 86.975,104.895 ; U5.1 76.75,94.65 76.5,94.9 76.5,96.35 76.775,96.625 77.525,96.625 78,97.1 78,100.1 79.545,101.645 83.72,101.645 86.975,104.9
GND: B1.1 B1.2 B2.1 B2.2 C1.2 C2.1 C3.1 C4.1 C5.1 C6.1 C7.1 C8.1 C9.1 C10.1 C11.2 C12.1 D5.2 J1.3 J1.6 J1.7 J1.8 J1.9 O1.2 P1.20 P1.22 Q1.S Q2.S Q3.S Q4.S R5.1 R6.1 R7.1 R8.1 R11.1 R12.2 RE1.2 RE1.5 TP5.1 U1.2 U1.8 U2.3 U2.5 U2.6 U2.7 U2.8 U3.9 U3.10 U3.11 U3.12 U3.13 U3.15 U4.1 U5.3 VR1.3 VR2.3 | length 134.5
  Top Layer w0.254: J1.6 73.096,106.375 78.175,106.375 79.75,104.8 83.225,104.8 83.475,104.55 83.475,103.4 82.965,102.89 U1.2 ; v1(73.2,92.075) 73.225,92.1 C10.1 ; v1(76.375,98.225) C9.1 ; U5.3 77.775,95.95 78.2,96.375 U4.1 79.475,96.45 v1(79.475,98.125) ; C5.1 C4.1 C6.1 ; C7.1 104.834,85.3 105.684,86.15 U3.15 ; C1.2 104.493,67.282 107.7,64.075 D5.2 ; U2.6 109.292,66.446 109.296,66.45 ; U2.5 109.275,66.954 109.296,66.975 ; U2.7 U2.8 109.296,66.45 ; U2.3 109.296,66.975 ; 109.296,66.45 109.296,66.975
  Bottom Layer w0.254: P1.20 54.38,82.85 52.35,82.85 51.05,84.15 51.05,105.175 52.325,106.45 57.529,106.45 J1.8 ; TP5.1 64.4,66.275 ; J1.9 J1.3 ; v2(71,57) 71,59.675 64.4,66.275 ; J1.7 73.2,98.475 v1(73.2,92.075) ; v2(73.95,68.2) 73.95,69.5 VR2.3 71.125,73 64.4,66.275 ; v1(76.375,98.225) 79.375,98.225 v1(79.475,98.125)
I2C1_SCL: P2.17 U2.1 | length 18.8
  Top Layer w0.254: U2.1 111.643,67.843 112,68.2 v1(112.425,68.2)
  Bottom Layer w0.254: v1(112.425,68.2) 112.425,82.235 P2.17
I2C1_SDA: P1.21 U2.4 | length 60.6
  Top Layer w0.254: v1(106.95,68.1) 107.207,67.843 U2.4
  Bottom Layer w0.254: P1.21 53.25,78.85 54.425,77.675 58.65,77.675 59.125,78.15 96.9,78.15 v1(106.95,68.1)
NetB1_3: B1.3 B1.4 R21.1 | length 25.3
  Top Layer w0.254: B1.3 B1.4 85,61.425 R21.1
NetB2_3: B2.3 B2.4 R22.1 | length 40.5
  Top Layer w0.254: B2.3 B2.4 71.4,62.15 98.475,62.15 99.825,63.5 R22.1
NetC7_2: C7.2 U3.14 | length 2.4
  Top Layer w0.254: C7.2 104.75,86.65 U3.14
NetC10_2: C10.2 R15.1 U4.2 U4.6 | length 17.6
  Top Layer w0.254: C10.2@76.425,92.1 C10.2 77,92.1 77.775,92.875 81.2,92.875 83.375,95.05 ; U4.2 81.575,95.725 ; R15.1 81.575,95.725 ; U4.6 83.85,95.05 83.375,95.05 ; 81.575,95.725 82.7,95.725 83.375,95.05
NetD1_1: D1.1 Q1.D | length 3.2
  Top Layer w0.254: D1.1 89.6,97.587 Q1.D
NetD1_2: D1.2 R2.1 | length 3.2
  Top Layer w0.254: D1.2 91.4,97.525 R2.1
NetD2_1: D2.1 Q2.D | length 3.2
  Top Layer w0.254: D2.1 95.892,97.583 Q2.D
NetD2_2: D2.2 R3.1 | length 3
  Top Layer w0.254: D2.2 97.642,97.475 R3.1
NetD3_1: D3.1 Q3.D | length 3.3
  Top Layer w0.254: D3.1 102.083,97.579 Q3.D
NetD3_2: D3.2 R4.1 | length 3.1
  Top Layer w0.254: D3.2 103.822,97.45 R4.1
NetD4_1: D4.1 Q4.D | length 3.3
  Top Layer w0.254: D4.1 110.375,99.863 Q4.D
NetD4_2: D4.2 R1.1 | length 3.2
  Top Layer w0.254: D4.2 109.762,97.4 R1.1
NetJ1_4: J1.4 R16.2 U1.7 | length 25.4
  Top Layer w0.254: R16.2 62.6,89.65 67.85,94.9 67.85,102.475 J1.4 74.827,102.477 75.3,102.95 76.515,102.95 U1.7@76.55,102.915
NetJ1_5: J1.5 R16.1 U1.6 | length 25.6
  Top Layer w0.254: R16.1 61.15,98.277 J1.5 67.023,104.15 68.775,104.15 69.675,103.25 74.425,103.25 75.36,104.185 U1.6@76.55,104.185
NetO1_1: O1.1 R10.1 R12.1 | length 6.1
  Top Layer w0.254: O1.1 103.8,52.225 104.75,53.175 R12.1 105.9,53.55 107.3,54.95 R10.1
NetO1_3: O1.3 R9.1 R11.2 R13.1 | length 7.9
  Top Layer w0.254: R11.2 R13.1 103.325,57.075 104.975,55.425 R9.1 103.3,53.525 O1.3
NetO1_4: O1.4 P2.35 R13.2 | length 26.4
  Top Layer w0.254: R13.2 101.2,53.525 O1.4 99.85,53.525 98.275,55.1 98.275,58.075 99.3,59.1 112.183,59.1 P2.35
NetP1_36: P1.36 VR1.2 | length 26.9
  Top Layer w0.254: P1.36 55.79,61.94 58.15,64.3 60.575,64.3 65.6,69.325 VR1.2
NetP1_38: P1.38 VR2.2 | length 26.6
  Top Layer w0.254: P1.38 56.205,58.58 58.225,60.6 60.4,60.6 70.3,70.5 VR2.2
NetP2_2: P2.2 Q3.G R7.2 | length 31.9
  Top Layer w0.254: R7.2 102.775,100.15 103.475,100.85 104.304,100.85 Q3.G 105.425,101.875 106.1,101.2 106.1,94.4 107.5,93 110.1,93 112.875,95.775 112.875,97.225 113.7,98.05 114.9,98.05 115.7,98.85 115.7,103.3 116.7,104.3 P2.2
NetP2_4: P2.4 Q2.G R6.2 | length 39
  Top Layer w0.254: R6.2 95.283,100.05 96.5,100.05 97.275,100.825 98.083,100.825 Q2.G 99.133,101.667 99.8,101 99.8,94.988 102.513,92.275 110.425,92.275 113.575,95.425 117.25,95.425 118.15,96.325 118.15,100.36 P2.4
NetP2_10: P2.10 Q1.G R5.2 | length 37.9
  Top Layer w0.254: R5.2 90.05,100.075 90.85,100.875 91.838,100.875 Q1.G 93.7,101.013 93.7,94.3 96.6,91.4 111.325,91.4 112.85,92.925 115.535,92.925 P2.10
NetP2_19: P2.19 U3.8 | length 8
  Top Layer w0.254: U3.8 110.95,86.65 111.95,85.65 111.95,83.736 P2.19
NetP2_23: P2.23 U3.7 | length 12.5
  Top Layer w0.254: U3.7 110.675,86.15 111.425,85.4 111.425,79.025 114.061,76.389 P2.23
NetP2_25: P2.25 U3.6 | length 14.3
  Top Layer w0.254: U3.6 110.425,85.65 110.8,85.275 110.8,77.255 P2.25
NetP2_27: P2.27 U2.2 | length 6.2
  Top Layer w0.254: U2.2 109.804,68.454 110.25,68.9 111,68.9 113.402,71.302 P2.27
NetP2_29: P2.29 U2.11 | length 9.1
  Top Layer w0.254: U2.11 112.029,66.446 113.425,65.05 114.725,65.05 115.425,65.75 115.425,67.543 P2.29
NetP2_31: P2.31 U2.12 | length 3.8
  Top Layer w0.254: U2.12 113.47,66.954 P2.31
NetQ4_G: Q4.G R8.2 U5.4 | length 70.3
  Top Layer w0.254: U5.4 74.05,95.95 70.425,92.325 70.425,91.6 73.15,88.875 86.7,88.875 88.325,90.5 88.325,97.375 86.1,99.6 86.1,102.1 87.775,103.775 109.375,103.775 111.275,101.875 110.2,100.8 108.75,100.8 108.125,100.175 R8.2
NetR14_1: R14.1 R15.2 U4.7 | length 15
  Top Layer w0.254: R14.1 82.375,93.475 86.25,93.475 86.675,93.9 86.675,95.425 86.375,95.725 U4.7 84.05,95.725 83.225,96.55 R15.2
NetR17_1: R17.1 R18.2 RE1.1 | length 5.7
  Top Layer w0.254: R18.2 94.75,67.225 RE1.1 96.55,69.75 R17.1
NetR19_1: R19.1 R20.1 RE1.3 | length 5
  Top Layer w0.254: RE1.3 95.275,73.475 R19.1 96.075,74.55 R20.1
NetTP2_1: TP2.1 U4.3 U5.2 | length 72.7
  Top Layer w0.254: TP2.1 56.225,59.8 52.825,59.8 51.975,60.65 51.975,84.775 52.7,85.5 63.6,85.5 64.375,84.725 66.625,84.725 67.4,85.5 67.4,90 74.15,96.75 75.475,96.75 75.975,96.25 75.975,94.2 76.275,93.9 77.775,93.9 78.3,94.425 78.3,95.1 ; U5.2 78.1,95.3 78.3,95.1 ; U4.3 79.5,95.125 79.475,95.1 78.3,95.1
RE_A: C11.1 D5.1 P2.16 R17.2 | length 44.7
  Top Layer w0.254: R17.2 99.3,68.1 C11.1 100.2,68.125 ; v2(103.85,77.475) 101.85,75.475 101.85,71.975 101.225,71.35 101.225,69.15 100.2,68.125 ; D5.1 108.6,63.425 108.6,62.5 108.4,62.3 106.1,62.3 105.7,62.7 105.7,63.65 104.55,64.8 102,64.8 101.1,65.7 101.1,67.225 100.2,68.125
  Bottom Layer w0.254: v2(103.85,77.475) 106.925,80.55 108.825,80.55 110.2,81.925 110.2,83.2 112.5,85.5 115.73,85.5 P2.16
RE_B: C12.2 D5.3 P2.18 R19.2 | length 48.6
  Top Layer w0.254: R19.2 C12.2 100.325,71.825 101.1,72.6 101.1,77.375 102.525,78.8 104.8,78.8 v2(106.175,77.425) 102.55,73.8 102.55,66.325 103.4,65.475 105.35,65.475 106.75,64.075 D5.3
  Bottom Layer w0.254: v2(106.175,77.425) 106.5,77.425 110.875,81.8 110.875,83.1 112.875,85.1 115.325,85.1 116.445,83.98 P2.18
RE_SWITCH: P2.26 RE1.4 | length 42.8
  Bottom Layer w0.254: RE1.4 89.325,67.95 90.875,66.4 112.525,66.4 113.6,67.475 114.75,67.475 114.775,67.45 115.5,68.175 115.5,72.57 P2.26
SPI1_MISO: P2.13 U3.4 | length 11.6
  Top Layer w0.254: v2(108.3,82.425) 108.625,82.75 U3.4
  Bottom Layer w0.254: v2(108.3,82.425) 108.3,83.197 P2.13
SPI1_MOSI: P2.15 U3.3 | length 14.7
  Top Layer w0.254: v2(106.65,82.475) 108.125,83.95 U3.3
  Bottom Layer w0.254: v2(106.65,82.475) 106.65,81.825 107.3,81.175 108.6,81.175 109.525,82.1 109.525,83.825 112.263,86.563 P2.15
SPI1_NSS: P1.17 U3.5 | length 62.1
  Top Layer w0.254: P1.17 54.305,85.075 57.5,85.075 58.3,84.275 ; 58.3,84.237 67.238,84.237 68.7,82.775 102.075,82.775 103.825,81.025 108.825,81.025 109.8,82 109.8,84.125 U3.5
SPI1_SCK: P2.11 U3.2 | length 16.9
  Top Layer w0.254: v2(105,82.5) 105.1,82.5 106.2,83.6 107.05,83.6 107.625,84.175 U3.2
  Bottom Layer w0.254: v2(105,82.5) 114.151,91.651 P2.11
pads on no net: J1.1 J1.2 P1.1 P1.2 P1.3 P1.4 P1.5 P1.6 P1.7 P1.8 P1.9 P1.10 P1.11 P1.12 P1.13 P1.14 P1.15 P1.19 P1.23 P1.24 P1.25 P1.26 P1.27 P1.28 P1.29 P1.30 P1.31 P1.32 P1.33 P1.34 P1.35 P1.37 P1.39 P1.40 P2.1 P2.6 P2.7 P2.8 P2.9 P2.20 P2.21 P2.22 P2.24 P2.28 P2.30 P2.32 P2.33 P2.34 P2.36 P2.37 P2.38 P2.39 P2.40 R12.3 U4.5 VR1.4 VR1.5 VR1.6 VR1.7 VR2.4 VR2.5

## Polygon pours and split planes (outlines as drawn)
GND on Top Layer "GND_L01_P054" (solid, remove dead copper, pour order 54): 50,110 120,110 120,50 50,50
GND on Top Layer "Top Layer - GND" (solid, pour order 50): 106.6,86.9 109.7,86.9 109.8,87 109.8,88.2 106.6,88.2
GND on Top Layer "Top Layer - GND" (solid, pour order 22): 108.525,66.2 109.55,66.2 109.55,64.9 108.525,64.9
3V3 on Top Layer "3V3" (solid, pour order 8): 104.2,58 104.2,56.55 104.5,56.25 110.5,56.25 110.5,57.875 110.325,58.05 105.225,58.05
3V3 on Bottom Layer "3V3_L02_P056" (solid, remove dead copper, pour order 56): 50,110 120,110 120,50 50,50

## Silkscreen, mask and mechanical layers (free items; w line width, h text height)
Top Overlay:
  lines w0.254: 109.325,90.025 109.325,90.225 109.325,89.35 110.125,89.35 ; 110.85,64.1 111.65,64.1 111.65,63.225
  text "x" at 109.5,91.175 h0.76 r180
  text "z" at 108.925,89.575 h0.76 r180
  text "y" at 110.65,89.225 h0.76
  text "z" at 112.05,63.875 h0.76
  text "y" at 110,63.8 h0.76
  text "x" at 111.4,62.4 h0.76

## Text inside footprints (layer, text, board x,y; h text height)
D1: Top Overlay "A" at 90.575,95.4 h0.38 r270
D2: Top Overlay "A" at 96.825,95.4 h0.38 r270
D3: Top Overlay "A" at 103.075,95.436 h0.38 r270
D4: Top Overlay "A" at 109,95.413 h0.38 r270
P1: Top Overlay "1" at 53.05,106.275 h0.76; Top Overlay "2" at 55.5,106.325 h0.76; Top Overlay "39" at 52.55,52.7 h0.76; Top Overlay "40" at 55.075,52.625 h0.76
P2: Top Overlay "1" at 114.075,106.325 h0.76; Top Overlay "2" at 116.45,106.35 h0.76; Top Overlay "39" at 113.5,52.825 h0.76; Top Overlay "40" at 116.025,52.825 h0.76